# Altium PCB WIZ750SR.PcbDoc (part 1 of 2)
Units mm, origin at the board's own origin, x right, y up, seen from the top; angles counter-clockwise.
Board outline 45 x 30 mm, 4 copper layers (Top Layer, Internal Plane 1, Internal Plane 2, Bottom Layer); 93 components, 69 nets, 325 pads, 127 vias.
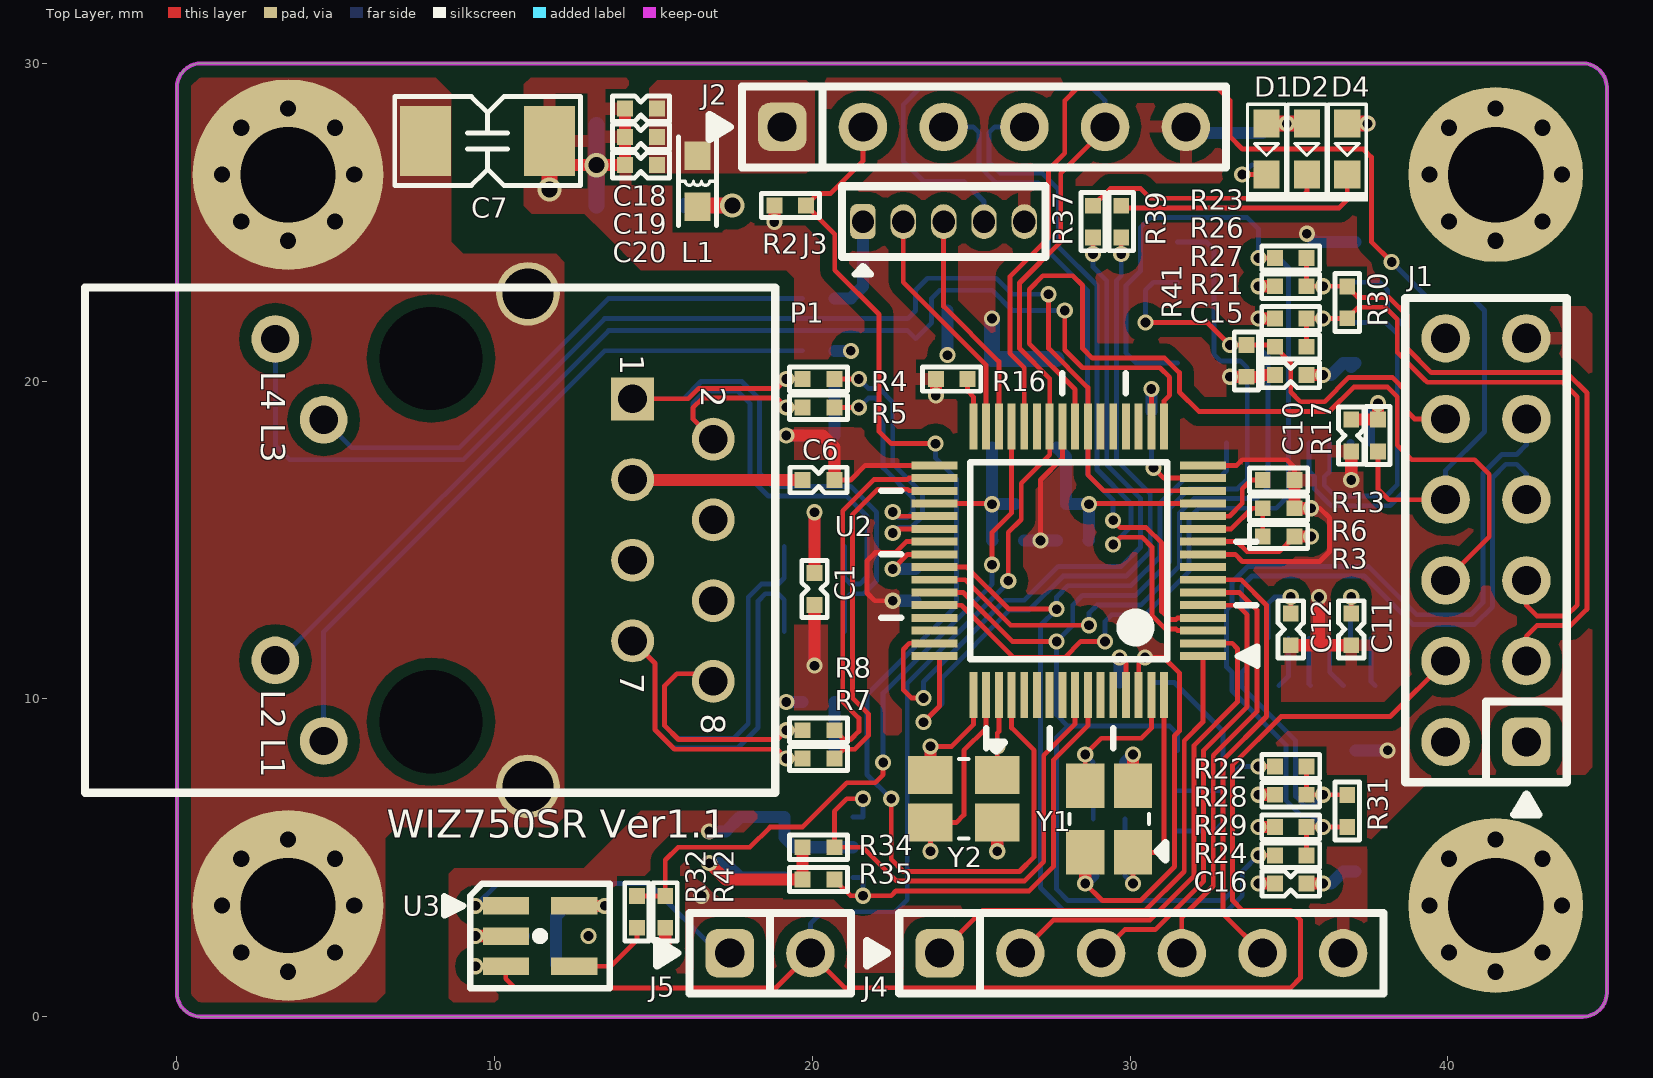
[diagram p0: Top Layer view]
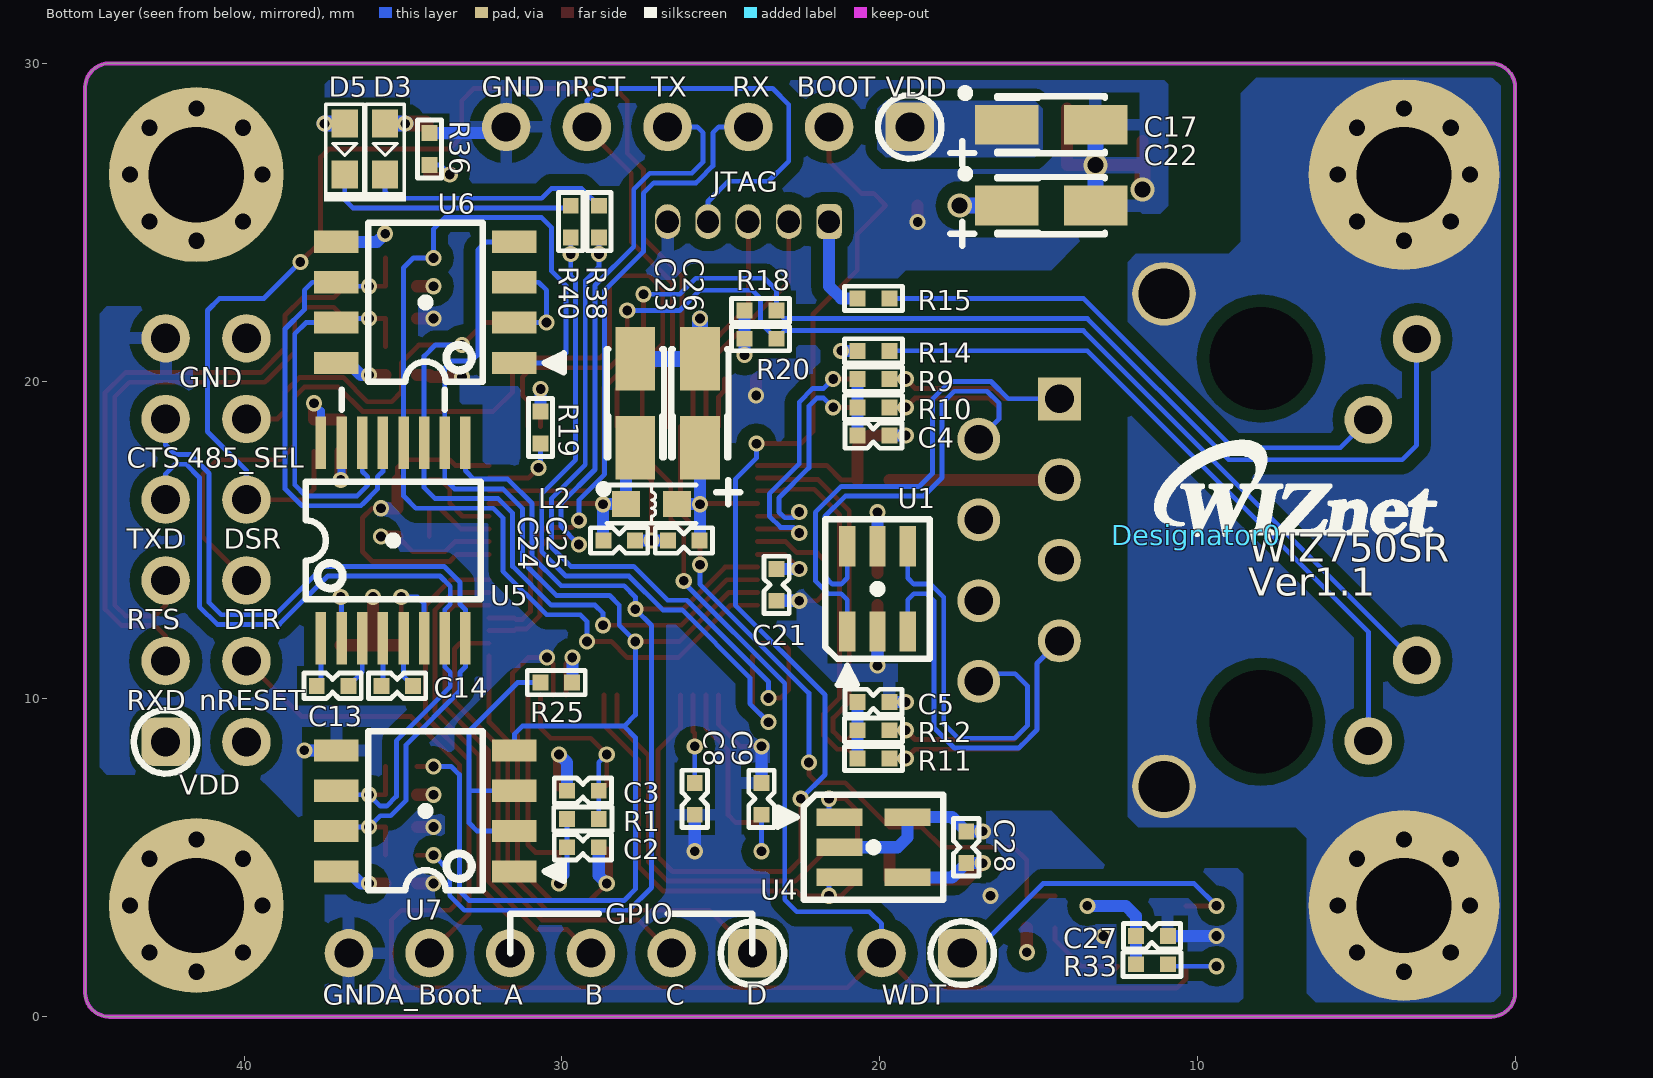
[diagram p1: Bottom Layer view, seen from below]
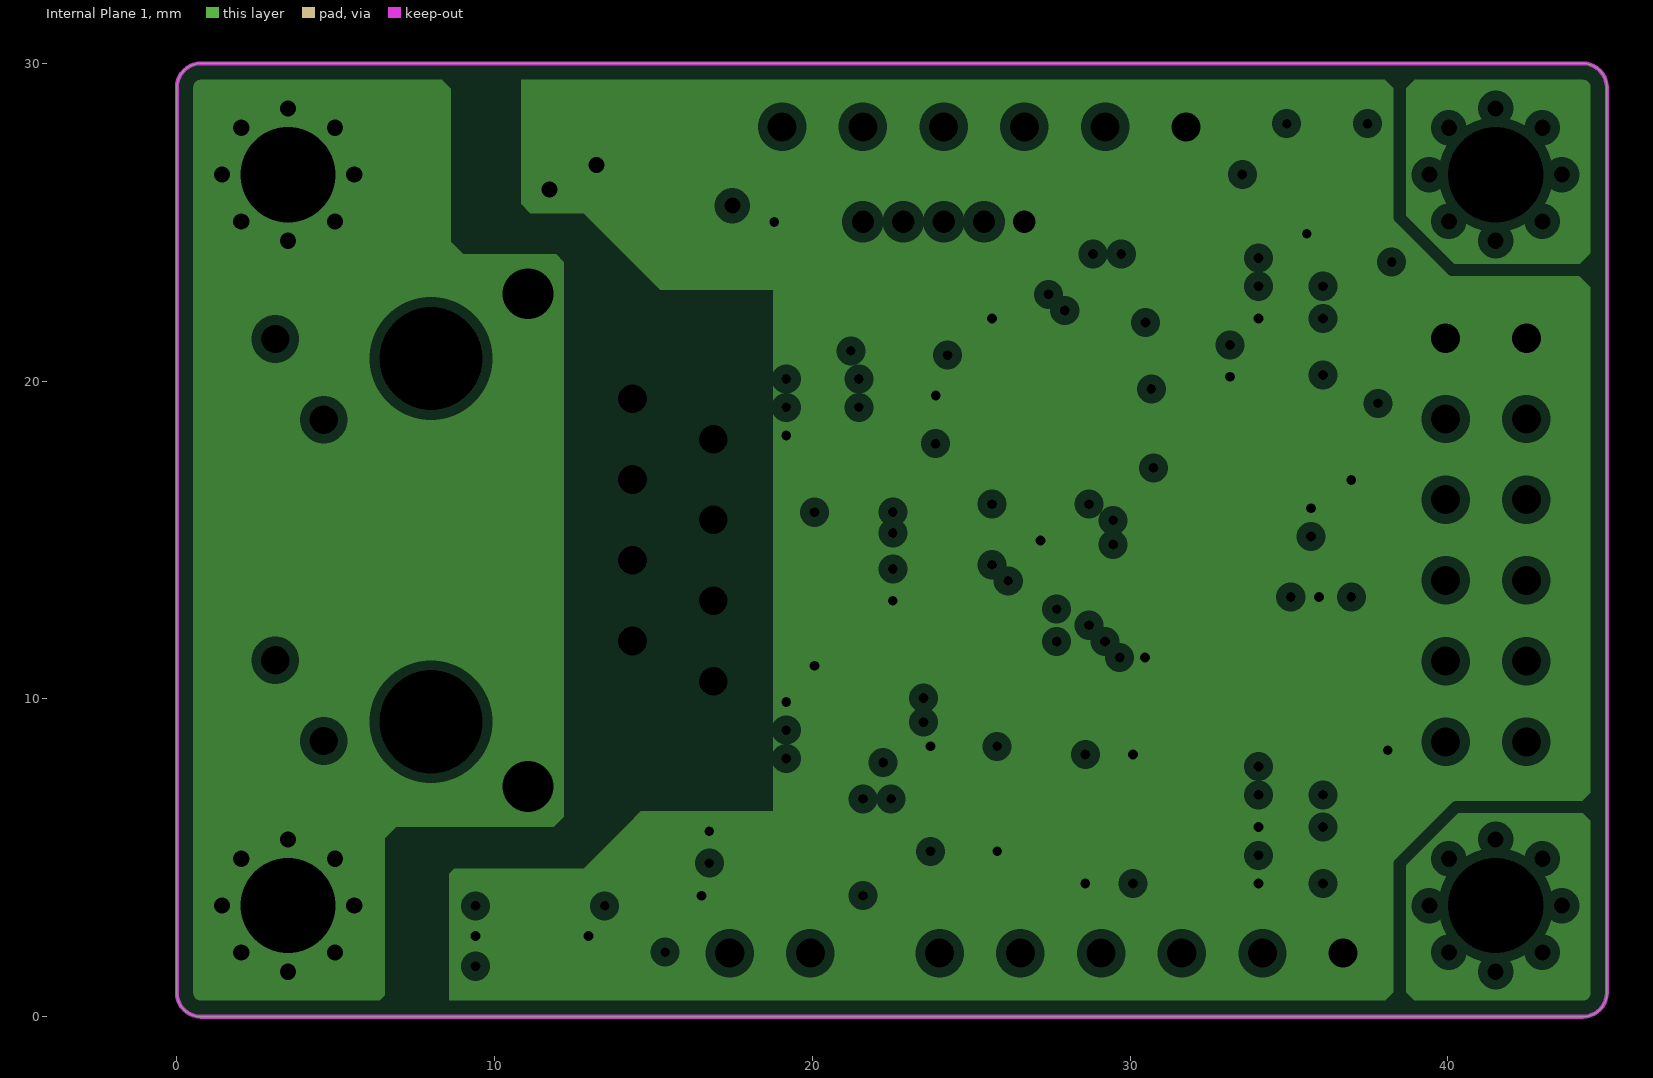
[diagram p2: Internal Plane 1, clearances drawn from the general rule]
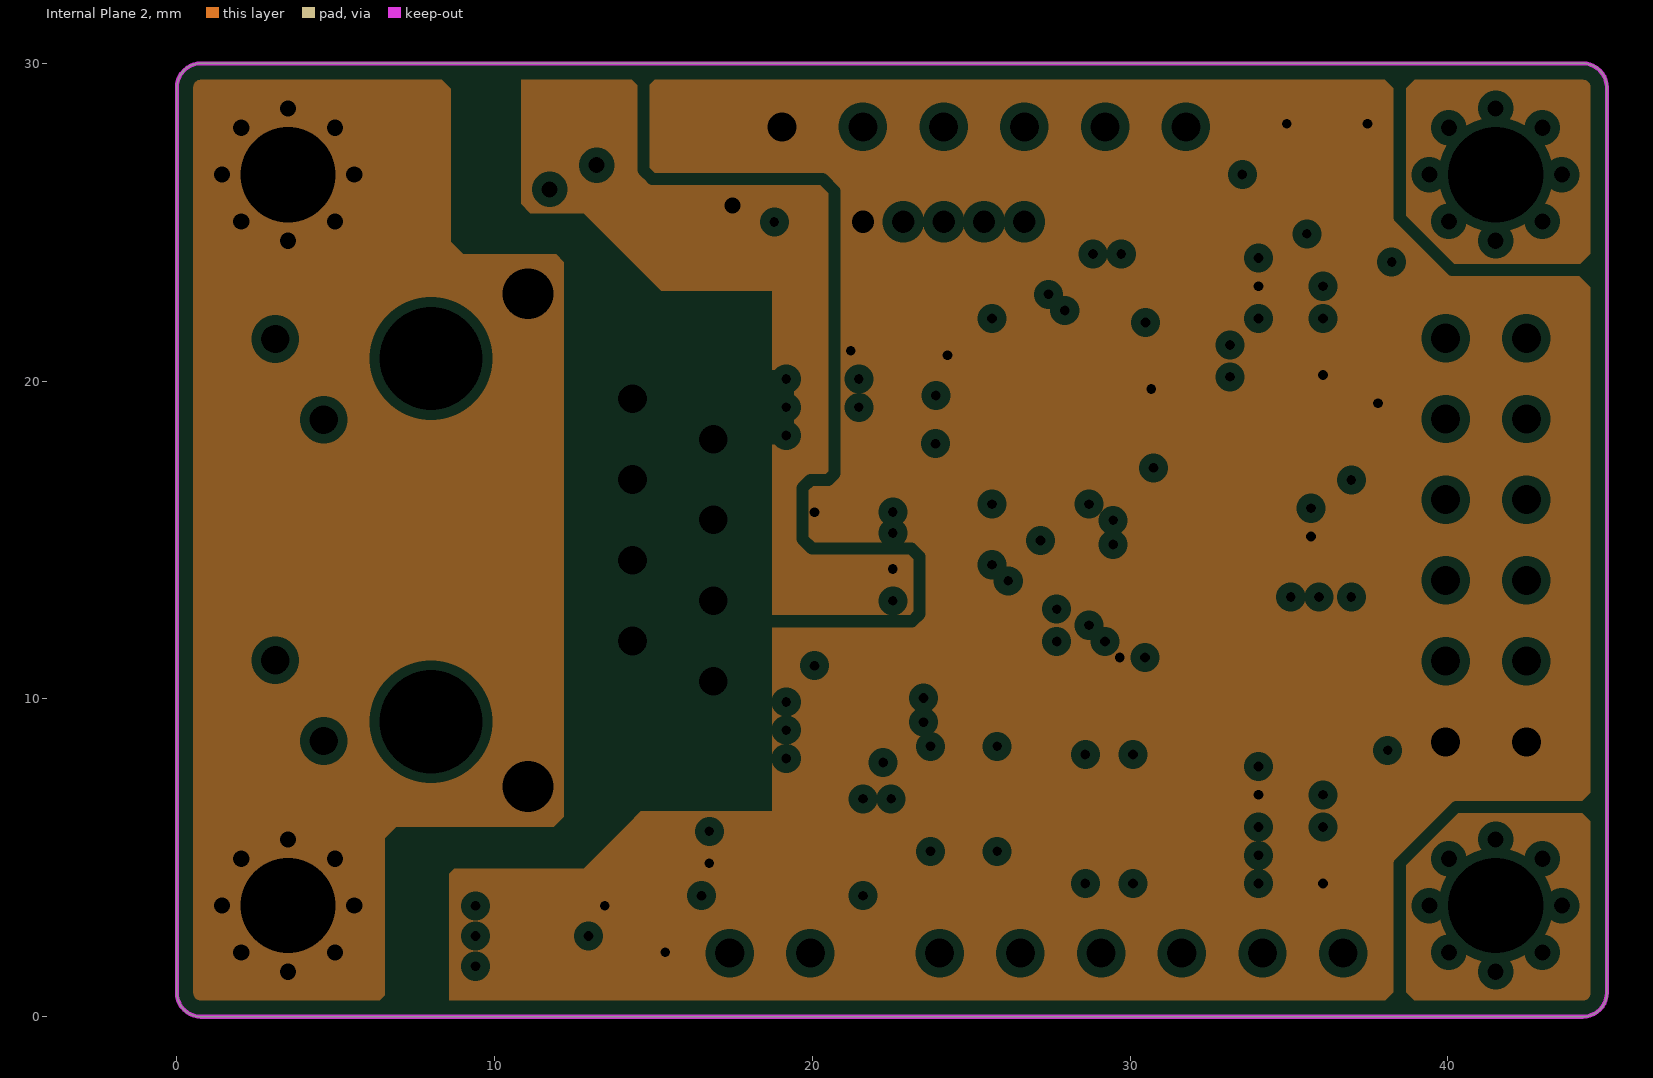
[diagram p3: Internal Plane 2, clearances drawn from the general rule]
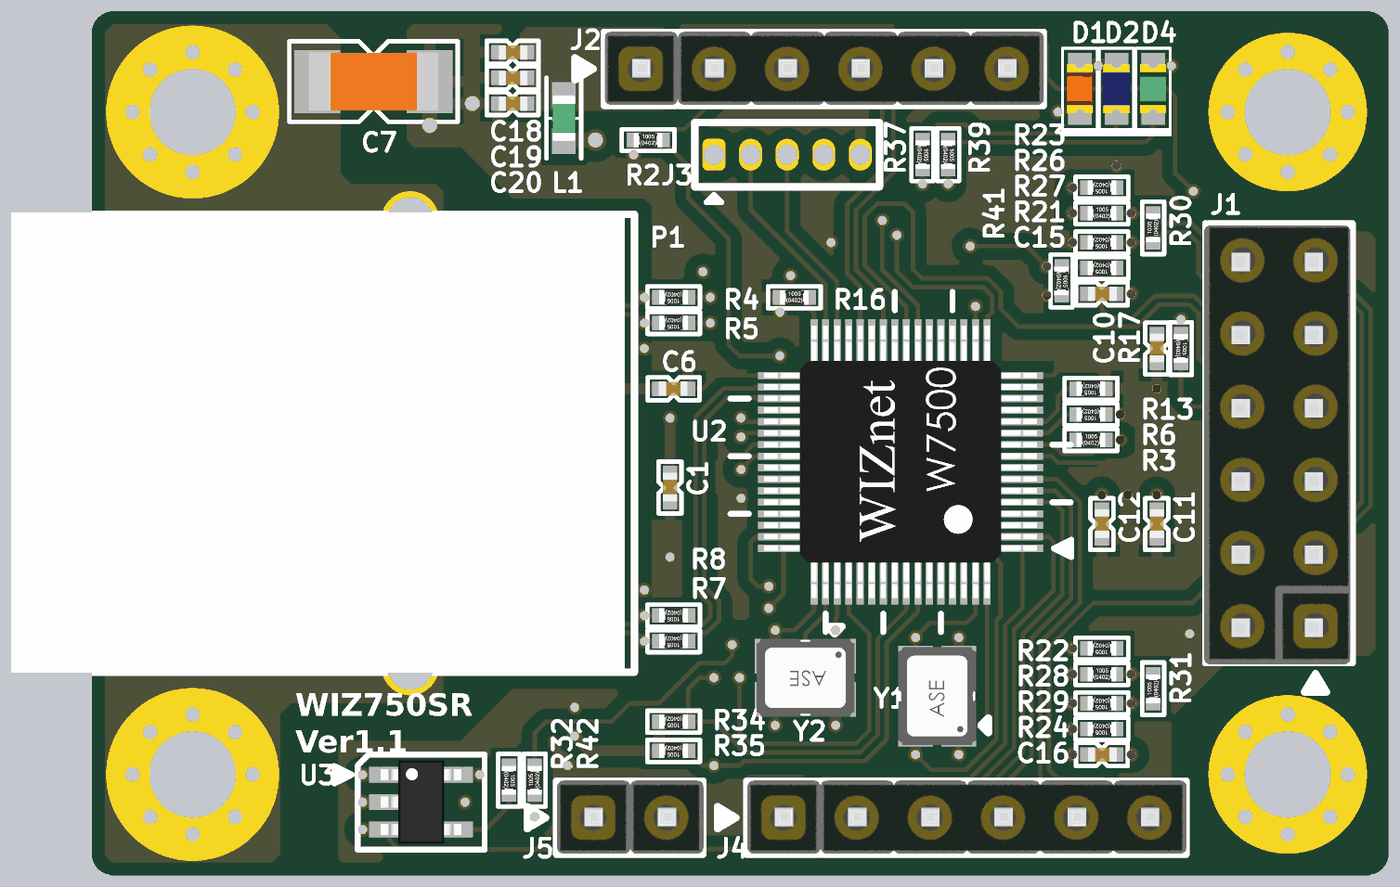
[diagram p5: 3D render of the assembled board from above, using the file's embedded part models]
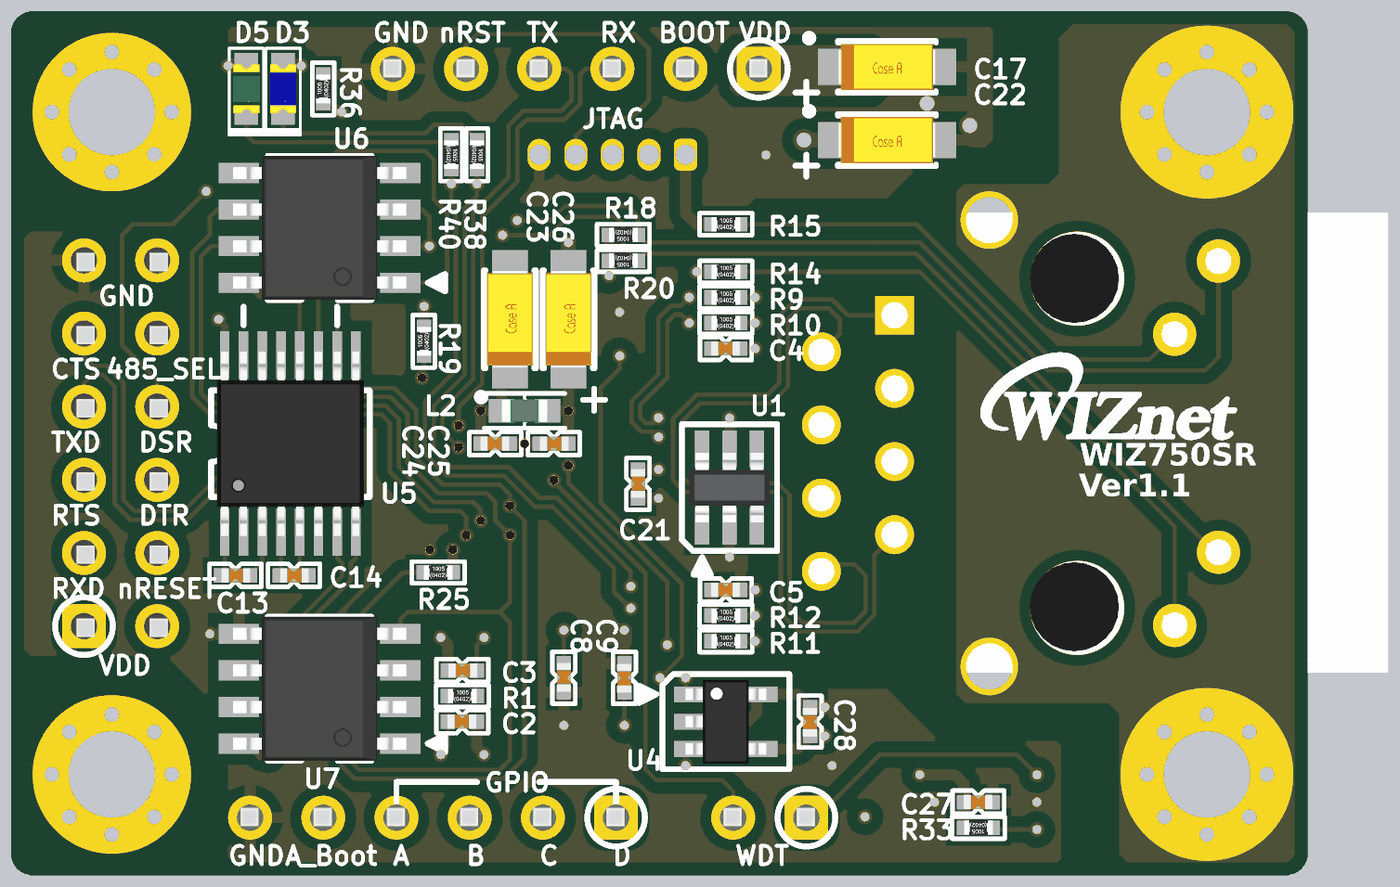
[diagram p6: 3D render of the assembled board from below, using the file's embedded part models]

## Layer stack, top to bottom
Top Solder: solder mask 0.0102, Solder Resist, Dk 3.5
Top Layer: signal copper 0.0356
Dielectric1: core 0.32, FR-4, Dk 4.8
Internal Plane 1: plane copper 0.0356, net (Multiple Nets)
Dielectric5: prepreg 0.32, FR-4, Dk 4.8
Internal Plane 2: plane copper 0.0356, net (Multiple Nets)
Dielectric6: core 0.32, FR-4, Dk 4.8
Bottom Layer: signal copper 0.0356
Bottom Solder: solder mask 0.0102, Solder Resist, Dk 3.5

## Board outline
0,0.762 0,29.238 cw(c0.762,29.238) 0.762,30 44.238,30 cw(c44.238,29.238) 45,29.238 45,0.762 cw(c44.238,0.762) 44.238,0 0.762,0 cw(c0.762,0.762)

## Design rules (kind name [scope] priority, off if disabled: settings)
Clearance [All] p1: gap=0.15 except(0.381: Arc-Poly Track-Poly SMDPad-Poly THPad-Poly Via-Poly Fill-Poly Poly-Poly Poly-Region)
DiffPairsRouting [All] p1: maxlimit=0.254 minlimit=0.127 mostfreqgap=0.152 toplayer_minwidth=0.152 toplayer_maxwidth=0.381 toplayer_prefwidth=0.152 bottomlayer_minwidth=0.152 bottomlayer_maxwidth=0.381 bottomlayer_prefwidth=0.152 maxuncoupledlength=15.24
HoleSize [All] p1: absolutevalues=TRUE maxlimit=4.064 minlimit=0.025 maxpercent=80.000 minpercent=20.000
PlaneClearance [All] p1: clearance=0.305
PlaneConnect [All] p1: planeconnectstyle=Direct reliefexpansion=0.508 reliefentries=4 reliefconductorwidth=0.254 reliefairgap=0.254
PolygonConnect PolygonConnect_2 [IsPad vs IsNamedPolygon('Top Layer-GND') Or  IsNamedPolygon('Bottom Layer-GND')] p1: connectstyle=Relief reliefconductorwidth=0.381 reliefentries=4 polygonreliefangle="90 Angle" airgapwidth=0.381
PolygonConnect PolygonConnect_1 [IsVia] p2: connectstyle=Direct reliefconductorwidth=0.254 reliefentries=4 polygonreliefangle="90 Angle" airgapwidth=0.254
PolygonConnect [All] p3: connectstyle=Direct reliefconductorwidth=0.254 reliefentries=4 polygonreliefangle="90 Angle" airgapwidth=0.254
RoutingVias [All] p1: holewidth=0.305 width=0.508 viastyle="Through Hole" minholewidth=0.305 minwidth=0.508 maxholewidth=0.508 maxwidth=0.762
SolderMaskExpansion [All] p1: expansion=0
Width [All] p1: maxlimit=2.54 minlimit=0.102 preferedwidth=0.152 minimp=50.000000 maximp=50.000000 favimp=50.000000
26 further rules are at their usual default settings.

## Classes and differential pairs
component class 1.WIZ750SR_W7500P: C1 C2 C3 C4 C5 C6 C7 C8 C9 P1 R1 R2 R3 R4 R5 R6 R7 R8 R9 R10 R11 R12 R13 R14 R15 R16 R17 R18 R19 R20 U1 U2 Y1 Y2
component class 2.WIZ750SR_Transceiver: C10 C11 C12 C13 C14 C15 C16 J1 LD1 LD2 R21 R22 R23 R24 R25 R26 R27 R28 R29 R30 R31 R41 U5 U6 U7
differential pair MDI_T: +MDI_T_P -MDI_T_N
differential pair MDI_R: +MDI_R_P -MDI_R_N
differential pair MDI0_T: +MDI0_T_P -MDI0_T_N
differential pair MDI0_R: +MDI0_R_P -MDI0_R_N

## Components (designator, comment, footprint, x,y, rotation, side; value= is the part's Value field where it differs from the comment)
C1 "0.1uF" CAP-0402 20.066,13.462 r90 top
C2 "30pF" CAP-0402 29.337,5.334 r0 bottom
C3 "30pF" CAP-0402 29.337,7.112 r180 bottom
C4 "0.1uF" CAP-0402 20.193,18.288 r0 bottom
C5 "0.1uF" CAP-0402 20.193,9.906 r0 bottom
C6 "0.1uF" CAP-0402 20.193,16.891 r180 top
C7 "1nF/2kV" CAP-1808 9.779,27.559 r180 top
C8 "27pF" CAP-0402 25.815,6.858 r90 bottom
C9 "27pF" CAP-0402 23.715,6.858 r270 bottom
C10 "0.1uF" CAP-0402 36.957,18.288 r90 top
C11 "0.1uF" CAP-0402 36.957,12.192 r90 top
C12 "0.1uF" CAP-0402 35.052,12.192 r90 top
C13 "0.1uF" CAP-0402 37.211,10.414 r180 bottom
C14 "0.1uF" CAP-0402 35.179,10.414 r180 bottom
C15 "0.1uF" CAP-0402 35.052,20.193 r0 top
C16 "0.1uF" CAP-0402 35.052,4.191 r0 top
C17 "10uF/16V" "CAP-A Size" 14.605,28.067 r180 bottom
C18 "0.1uF" CAP-0402 14.605,28.575 r0 top
C19 "0.1uF" CAP-0402 14.605,27.686 r0 top
C20 "0.1uF" CAP-0402 14.605,26.797 r0 top
C21 "0.1uF" CAP-0402 23.241,13.589 r90 bottom
C22 "10uF/16V" "CAP-A Size" 14.605,25.527 r180 bottom
C23 "10uF/16V" "CAP-A Size" 27.686,19.304 r90 bottom
C24 "0.1uF" CAP-0402 28.194,14.986 r0 bottom
C25 "0.1uF" CAP-0402 26.162,14.986 r180 bottom
C26 "10uF/16V" "CAP-A Size" 25.654,19.304 r90 bottom
C27 "0.1uF" CAP-0402 11.43,2.54 r0 bottom
C28 "0.1uF" CAP-0402 17.272,5.334 r270 bottom
D1 "RED-0603" LED-0603-RED 34.29,27.305 r270 top
D2 "BLUE-0603" LED-0603-BLUE 35.56,27.305 r270 top
D3 "BLUE-0603" LED-0603-BLUE 35.56,27.305 r270 bottom
D4 "GREEN-0603" LED-0603-GREEN 36.83,27.305 r270 top
D5 "GREEN-0603" LED-0603-GREEN 36.83,27.305 r270 bottom
Designator0 "Comment" LOGO-WIZNET(SMALL) 10.033,15.164 r180 bottom
J1 "2.54mm 6x2 Pin Header DIP" IDC-2X6 42.466,8.65 r90 top locked
J2 "2.54mm 1x6 Pin Header DIP" IDC-1X6 19.05,28 r0 top locked
J3 "1.27mm_1x5_Pin_header_DIP" IDC-1X5(1.27MM) 21.59,25.019 r0 top
J4 "2.54mm 1x6 Pin Header DIP" IDC-1X6 24.003,2 r0 top
J5 "2.54mm Pin Header" IDC-1X2 17.399,2 r0 top locked
L1 "HH-1M1608-121JT" IND-0603 16.383,26.289 r270 top
L2 "HH-1M1608-121JT" IND-0603 27.178,16.129 r180 bottom
P1 "BS-RB10005" RJ45-125BAG1A 8,15 r270 top locked
R1 "1M" RES-0402#1 29.337,6.223 r180 bottom
R2 "4.7K" RES-0402#1 19.304,25.527 r0 top
R3 "4.7K" RES-0402#1 34.671,15.113 r0 top
R4 "2.2R" RES-0402#1 20.193,20.066 r180 top
R5 "2.2R" RES-0402#1 20.193,19.177 r180 top
R6 "4.7K" RES-0402#1 34.671,16.002 r180 top
R7 "2.2R" RES-0402#1 20.193,8.128 r180 top
R8 "2.2R" RES-0402#1 20.193,9.017 r180 top
R9 "49.9R/1%" RES-0402#1 20.193,20.066 r180 bottom
R10 "49.9R/1%" RES-0402#1 20.193,19.177 r180 bottom
R11 "49.9R/1%" RES-0402#1 20.193,8.128 r180 bottom
R12 "49.9R/1%" RES-0402#1 20.193,9.017 r180 bottom
R13 "4.7K" RES-0402#1 34.671,16.891 r180 top
R14 "330R" RES-0402#1 20.193,20.955 r180 bottom
R15 "330R" RES-0402#1 20.193,22.606 r180 bottom
R16 "6.19K/1%" RES-0402#1 24.384,20.066 r0 top
R17 "4.7K" RES-0402#1 37.795,18.288 r270 top
R18 "5.1K" RES-0402#1 23.749,22.225 r0 bottom
R19 "5.1K" RES-0402#1 30.67,18.542 r90 bottom
R20 "5.1K" RES-0402#1 23.749,21.336 r0 bottom
R21 "0R" RES-0402#1 35.052,21.082 r180 top
R22 "0R" RES-0402#1 35.052,7.874 r180 top
R23 "0R" RES-0402#1 35.052,23.876 r180 top
R24 "0R" RES-0402#1 35.052,5.08 r180 top
R25 "4.7K" RES-0402#1 30.175,10.516 r180 bottom
R26 "200R" RES-0402#1 35.052,22.987 r0 top
R27 "200R" RES-0402#1 35.052,21.971 r180 top
R28 "200R" RES-0402#1 35.052,6.985 r0 top
R29 "200R" RES-0402#1 35.052,5.969 r180 top
R30 "120R" RES-0402#1 36.83,22.479 r90 top
R31 "120R" RES-0402#1 36.83,6.477 r90 top
R32 "0R" RES-0402#1 14.478,3.302 r270 top
R33 "4.7K" RES-0402#1 11.43,1.651 r0 bottom
R34 "4.7K" RES-0402#1 20.193,5.334 r180 top
R35 "4.7K" RES-0402#1 20.193,4.318 r180 top
R36 "330R" RES-0402#1 34.163,27.305 r90 bottom
R37 "1K" RES-0402#1 28.829,25.019 r270 top
R38 "1K" RES-0402#1 28.829,25.019 r270 bottom
R39 "330R" RES-0402#1 29.718,25.019 r270 top
R40 "330R" RES-0402#1 29.718,25.019 r270 bottom
R41 "NC" RES-0402#1 33.655,20.637 r270 top
R42 "4.7K" RES-0402#2 15.367,3.302 r90 top
U1 "tpd4s009" SOT-23-6L 20.066,13.462 r90 bottom
U2 "W7500P" W7500-LQFP64 28.067,14.351 r180 top locked
U3 "STM6823RWY6F" SOT-23-5L 11.43,2.54 r0 top
U4 "24AA16T-I/OT" SOT-23-5L 20.193,5.334 r180 bottom
U5 "SP3232EBEY" TSSOP16(0.65/6.4) 35.306,14.986 r90 bottom locked
U6 "SP3485EN" SO-08 34.29,22.479 r0 bottom
U7 "SP3485EN" SO-08 34.29,6.477 r0 bottom
Y1 "12MHz" OSC-TZ1067B 29.337,6.223 r90 top
Y2 "25MHz" OSC-82J0626 24.765,6.858 r180 top

## Footprints (in the part's own frame and the unit in brackets; to place one, negate y for a bottom-side part, rotate by r counter-clockwise, add the part's x,y. Pads: shape width x height; smd on the part's side, far side on the other; paste and mask are expansions set on the pad)
CAP-0402 [mm]
  rect 0.5x0.5 smd: 1(-0.5,0) 2(0.5,0)
  silkscreen extent -0.9,-0.4 0.9,0.4, body extent -0.48,-0.25 0.52,0.25, height 0.6
CAP-1808 [mm] "Ceramic CAP 1808(4520)"
  rect 1.6x2.2 smd: 1(-1.95,0) 2(1.95,0)
  silkscreen extent -2.92,-1.4 2.92,1.4, body extent -2.25,-1.02 2.25,1.01, height 2
"CAP-A Size" [mm] "Tantal CAP A Size EIA/IECQ 3216"
  rect 2x1.25 smd: 1(-1.4,0) 2(1.4,0)
  silkscreen extent -3.17,-1.27 1.7,1.12, body extent -1.7,-0.8 1.7,0.8, height 1.75
IDC-1X2 [mil]
  rrect50% 60x60 hole 36: 1(0,0)
  round 60 hole 36: 2(100,0)
  silkscreen extent -90,-50 150,50, body extent -49,-49 151,51, height 336
IDC-1X5(1.27MM) [mm]
  rrect50% 0.8x1.1 hole 0.7: 1(0,0)
  oval 0.8x1.1 hole 0.7: 2(1.27,0) 3(2.54,0) 4(3.81,0) 5(5.08,0)
  silkscreen extent -0.66,-1.65 5.74,1.11
IDC-1X6 [mil] "6-Way 2.54 mm Male Header"
  rrect50% 60x60 hole 36: 1(0,0)
  round 60 hole 36: 2(100,0) 3(200,0) 4(300,0) 5(400,0) 6(500,0)
  silkscreen extent -90,-50 550,50, body extent -49,-49 551,51, height 336
IDC-2X6 [mil]
  rrect50% 60x60 hole 36: 1(0,0)
  round 60 hole 36: 2(0,100) 3(100,0) 4(100,100) 5(200,0) 6(200,100) 7(300,0) 8(300,100) 9(400,0) 10(400,100) 11(500,0) 12(500,100)
  silkscreen extent -90,-50 550,150, body extent -52,-48 548,152, height 336
IND-0603 [mm] "Inductor 0603(1608)"
  rect 0.89x0.82 smd: 1(-0.8,0) 2(0.8,0)
  silkscreen extent -1.4,-0.6 1.4,0.6, body extent -0.8,-0.4 0.8,0.4, height 0.95
LED-0603-BLUE [mm] "LED-0603-BLUE"
  rect 0.89x0.82 smd: 1(-0.8,0) 2(0.8,0)
  silkscreen extent -1.41,-0.65 1.65,0.65, body extent -0.85,-0.45 0.85,0.45, height 0.9
LED-0603-GREEN [mm] "LED-0603-GREEN"
  rect 0.89x0.82 smd: 1(-0.8,0) 2(0.8,0)
  silkscreen extent -1.41,-0.65 1.65,0.65, body extent -0.85,-0.45 0.85,0.45, height 0.9
LED-0603-RED [mm] "LED-0603-RED"
  rect 0.89x0.82 smd: 1(-0.8,0) 2(0.8,0)
  silkscreen extent -1.41,-0.65 1.65,0.65, body extent -0.85,-0.45 0.85,0.45, height 0.9
LOGO-WIZNET(SMALL) [mm]
  silkscreen extent -1.27,0 7.52,2.93
OSC-82J0626 [mm]
  rect 1.4x1.2 smd: 1(-1.05,-0.75) 2(1.05,-0.75) 3(1.05,0.75) 4(-1.05,0.75)
  silkscreen extent -1.27,-1.78 0.15,1.25, body extent -1.7,-1.35 1.7,1.35, height 1.06
OSC-TZ1067B [mm]
  rect 1.4x1.2 smd: 1(-1.05,-0.75) 2(1.05,-0.75) 3(1.05,0.75) 4(-1.05,0.75)
  silkscreen extent -1.27,-1.78 0.15,1.25, body extent -1.7,-1.35 1.7,1.35, height 1.06
RES-0402#1 [mm]
  rect 0.5x0.5 smd: 1(-0.5,0) 2(0.5,0)
  silkscreen extent -0.91,-0.38 0.91,0.38, body extent -0.5,-0.25 0.5,0.25, height 0.35
RES-0402#2 [mm]
  rect 0.5x0.5 smd: 1(-0.5,-0.004) 2(0.5,-0.004)
  silkscreen extent -0.91,-0.38 0.91,0.38, body extent -0.5,-0.25 0.5,0.25, height 0.35
RJ45-125BAG1A [mm]
  round 1.5 hole 0.89: L1(6.325,-3.38) L2(3.785,-4.9) L3(-3.785,-3.38) L4(-6.325,-4.9)
  rect 1.35x1.35 hole 0.9: R1(-4.445,6.34)
  round 1.35 hole 0.9: R2(-3.175,8.88) R3(-1.905,6.34) R4(-0.635,8.88) R5(0.635,6.34) R6(1.905,8.88) R7(3.175,6.34) R8(4.445,8.88)
  round 2 hole 1.6: R9(-7.75,3.05) R10(7.75,3.05)
  round 1.8 hole 3.25: ""(-5.715,0) ""(5.715,0)
  silkscreen extent -7.95,-10.89 7.95,10.83, body extent -8.03,-10.8 7.97,10.5, height 13.1
SO-08 [mm]
  rect 1.4x0.7 smd: 1(-2.8,1.905) 2(-2.8,0.635) 3(-2.8,-0.635) 4(-2.8,-1.905) 5(2.8,-1.905) 6(2.8,-0.635) 7(2.8,0.635) 8(2.8,1.905)
  silkscreen extent -4.35,-2.5 1.8,2.5, body extent -3.01,-2.5 3.01,2.5, height 1.75
SOT-23-5L [mm]
  rect 1.45x0.55 smd: 1(-1.075,0.95) 2(-1.075,0) 3(-1.075,-0.95) 4(1.075,-0.95) 5(1.075,0.95)
  silkscreen extent -3.01,-1.65 2.2,1.65, body extent -1.4,-1.45 1.4,1.45, height 1.45
SOT-23-6L [mm]
  rect 1.27x0.508 smd: 1(-1.34,0.95) 2(-1.34,0) 3(-1.34,-0.95) 4(1.34,-0.95) 5(1.34,0) 6(1.34,0.95)
  silkscreen extent -3.02,-1.65 2.2,1.65, body extent -1.21,-1.4 1.21,1.4, height 1.09
TSSOP16(0.65/6.4) [mil]
  rect 65x13 smd: 1(-121.04,89.57) 2(-121.04,63.98) 3(-121.04,38.39) 4(-121.04,12.8) 5(-121.04,-12.8) 6(-121.04,-38.39) 7(-121.04,-63.98) 8(-121.04,-89.57) 9(121.04,-89.57) 10(121.04,-63.98) 11(121.04,-38.39) 12(121.04,-12.8) 13(121.04,12.8) 14(121.04,38.39) 15(121.04,63.98) 16(121.04,89.57)
  silkscreen extent -73,-108 187,108, body extent -126,-100 126,100, height 47
W7500-LQFP64 [mm] "WIZnet ARM Cortex-M0, LQFP64, Pitch 0.40mm"
  rect 1.45x0.25 smd: 1(-4.225,3) 2(-4.225,2.6) 3(-4.225,2.2) 4(-4.225,1.8) 5(-4.225,1.4) 6(-4.225,1) 7(-4.225,0.6) 8(-4.225,0.2) 9(-4.225,-0.2) 10(-4.225,-0.6) 11(-4.225,-1) 12(-4.225,-1.4) 13(-4.225,-1.8) 14(-4.225,-2.2) 15(-4.225,-2.6) 16(-4.225,-3) 33(4.225,-3) 34(4.225,-2.6) 35(4.225,-2.2) 36(4.225,-1.8) 37(4.225,-1.4) 38(4.225,-1) 39(4.225,-0.6) 40(4.225,-0.2) 41(4.225,0.2) 42(4.225,0.6) 43(4.225,1) 44(4.225,1.4) 45(4.225,1.8) 46(4.225,2.2) 47(4.225,2.6) 48(4.225,3)
  rect 0.25x1.45 smd: 17(-3,-4.225) 18(-2.6,-4.225) 19(-2.2,-4.225) 20(-1.8,-4.225) 21(-1.4,-4.225) 22(-1,-4.225) 23(-0.6,-4.225) 24(-0.2,-4.225) 25(0.2,-4.225) 26(0.6,-4.225) 27(1,-4.225) 28(1.4,-4.225) 29(1.8,-4.225) 30(2.2,-4.225) 31(2.6,-4.225) 32(3,-4.225) 49(3,4.225) 50(2.6,4.225) 51(2.2,4.225) 52(1.8,4.225) 53(1.4,4.225) 54(1,4.225) 55(0.6,4.225) 56(0.2,4.225) 57(-0.2,4.225) 58(-0.6,4.225) 59(-1,4.225) 60(-1.4,4.225) 61(-1.8,4.225) 62(-2.2,4.225) 63(-2.6,4.225) 64(-3,4.225)
  silkscreen extent -5.92,-5.9 5.9,5.9, body extent -4.73,-4.74 4.73,4.72, height 1

## Part data
C1 C2 C3 C4 C5 C6 C8 C9 C10 C11 C12 C13 C14 C15 C16 C18 C19 C20 C21 C24 C25 C27 C28: library part CAP-0402, "Ceramic CAP 0402(1005)"
C7: library part CAP-1808, "Ceramic CAP 1808(4520)"
C17 C22 C23 C26: library part "CAP-A Size", "Tantla CAP A Size EIA/IECQ 3216"
D1 D2 D3 D4 D5: library part LED-0603, "LED-0603"
J1: library part "Header 6X2", "Header, 6-Pin, Dual row"
J2 J4: library part "Header 6", "Header, 6-Pin"
J5: library part "Header 2", "Header, 2-Pin"
L1 L2: library part IND-0603, "Inductor 0603(1608)"
P1: library part RB1-125BAG1A, "10/100 BASE-TX MAGJACK"
R1 R2 R3 R4 R5 R6 R7 R8 R9 R10 R11 R12 R13 R14 R15 R16 R17 R18 R19 R20 R21 R22 R23 R24 R25 R26 R27 R28 R29 R30 R31 R32 R33 R34 R35 R36 R37 R38 R39 R40 R41 R42: library part RES-0402, "RES-0402"
U1: "6-PIN SOT DBVor DCK Package"
U2: "WIZnet ARM Cortex-M0, Add PHY"
U3: library part STM6823, "Manual_Reset SOT23-5"
U4: library part 24AAxxT-i-OT, "SOT-23"
U5: "True +3.0V to +5.5V RS-232 Transceivers TSSOP16"
U6 U7: "RS485 Transceiver"
Y1: library part OSC-TZ1067B-12MHz, "X-tal 12MHz,3.2x2.5 SMD, CL=20pF"
Y2: library part OSC-82J0626-25MHz, "X-tal 25MHz,3.2x2.5 SMD, CL=18pF"

## Free pads (board coordinates)
  round 6 hole 3: ""(3.5,3.5) ""(3.5,26.5)
  round 5.5 hole 3: ""(41.5,3.5) ""(41.5,26.5)

## Via types
v1: diameter 0.508, hole 0.305, Top Layer to Bottom Layer, tented both sides, 92 vias
v2: diameter 0.762, hole 0.508, Top Layer to Bottom Layer, tented both sides, 35 vias

## Nets (pads, with @x,y where several pads share a name; then routed paths per layer and width w, separated by ;. In a path a pad name is that pad's centre, name@x,y a point inside that pad or via, vN(x,y) a via of type N, cw(c..) or ccw(c..) an arc to the next point about the centre after c; other vN are vias at no path point)
100M_LED: P1.L2 R20.1 U2.17 | length 37.1
  Top Layer w0.152: v1(27.94,22.225) 27.94,20.98 28.499,20.422 30.937,20.422 31.242,20.117 31.242,19.558 31.067,19.383 U2.17@31.067,18.576
  Bottom Layer w0.152: P1.L2@3.1,11.215 3.214,11.215 13.589,21.59 22.995,21.59 R20.1@23.249,21.336 23.749,21.836 23.749,22.606 24.003,22.86 25.654,22.86 26.289,22.225 v1(27.94,22.225)
422_TXD+: J1.7 R22.1 R28.2 R31.2 U5.7 U7.6 | length 26.8
  Top Layer w0.152: R22.1@35.552,7.874 R28.2@35.552,6.985 v1(36.068,6.985) R31.2@36.822,6.985
  Bottom Layer w0.152: U7.6@36.963,6.985 v1(36.068,6.985) 35.712,6.629 35.509,6.629 35.204,6.934 35.204,8.687 33.508,10.383 33.508,10.837 33.681,11.01 U5.7@33.681,11.912 33.681,12.813 33.508,12.986 33.508,13.544 33.833,13.868 37.364,13.868 38.888,12.344 40.843,12.344 41.402,12.903 41.402,16.968 41.822,17.388 42.164,17.388 42.466,17.086 J1.7@42.466,16.27
422_TXD-: J1.9 R24.1 R29.1 R31.1 U5.8 U7.7 | length 27.8
  Top Layer w0.152: R24.1@35.552,5.08 R29.1@35.552,5.969 v1(36.068,5.969) R31.1@36.822,5.969
  Bottom Layer w0.152: U7.7@36.963,5.969 v1(36.068,5.969) 35.712,6.325 35.383,6.325 34.9,6.808 34.9,8.561 33.204,10.257 33.204,10.837 33.031,11.01 U5.8@33.031,11.912 33.031,12.813 33.204,12.986 33.204,13.67 33.707,14.173 37.49,14.173 39.014,12.649 40.717,12.649 41.097,13.029 41.097,17.094 41.695,17.692 42.164,17.692 42.466,17.994 J1.9@42.466,18.81
485+: J1.3 R23.1 R26.2 R30.2 U5.13 U6.6 | length 34.9
  Top Layer w0.152: R23.1@35.552,23.876 R26.2@35.552,22.987 v1(36.068,22.987) R30.2@36.822,22.987 ; R30.2@36.83,22.979 37.178,22.631 38.15,22.631 38.71,22.072 38.71,21.031 39.472,20.269 43.738,20.269 44.374,19.633 44.374,12.828 44.285,12.738 43.854,12.308 42.799,12.308 42.466,11.975 J1.3@42.466,11.19
  Bottom Layer w0.152: U5.13@35.631,18.06 35.631,17.159 35.804,16.986 35.804,16.597 36.233,16.167 36.323,16.078 38.176,16.078 38.71,16.612 38.71,21.641 38.1,22.25 38.1,22.86 37.846,23.114 U6.6@37.09,23.114 ; v1(36.068,22.987) U6.6@36.963,22.987
485-: J1.5 R21.1 R27.1 R30.1 U5.14 U6.7 | length 31.7
  Top Layer w0.152: R21.1@35.552,21.082 R27.1@35.552,21.971 v1(36.068,21.971) 36.822,21.971 R30.1@36.83,21.979 37.178,22.327 38.024,22.327 38.405,21.946 38.405,20.905 39.256,20.054 39.345,19.964 43.612,19.964 44.069,19.507 44.069,12.954 43.727,12.612 42.799,12.612 42.466,12.945 J1.5@42.466,13.73
  Bottom Layer w0.152: v1(36.068,21.971) U6.7@36.963,21.971 ; U5.14@36.281,18.06 36.281,17.159 36.108,16.986 36.108,16.724 36.449,16.383 38.05,16.383 38.405,16.738 38.405,21.488 38.049,21.844 U6.7@37.09,21.844
485_SEL: J1.10 R21.2 R41.1 U2.42 U5.11 U6.2 U6.3 | length 34.9
  Top Layer w0.152: U2.42@23.842,13.751 24.806,13.751 26.238,12.319 v1(28.702,12.319) ; v1(30.48,21.844) 32.432,21.844 v1(33.139,21.137) R41.1@33.655,21.137 34.497,21.137 R21.2@34.552,21.082 35.052,20.582 35.052,19.66 35.357,19.355 36.119,19.355 36.881,20.117 38.252,20.117 38.71,19.66 38.71,19.05 38.95,18.81 J1.10@39.926,18.81
  Bottom Layer w0.152: v1(28.702,12.319) 28.702,12.7 28.956,12.954 30.328,12.954 31.547,14.173 31.547,15.85 32.004,16.307 33.985,16.307 34.331,16.653 U5.11@34.331,18.06 34.331,20.787 33.981,21.137 v1(33.139,21.137) ; U6.2@31.49,21.844 v1(30.48,21.844) 30.48,22.86 30.734,23.114 U6.3@31.49,23.114
APP_BOOT: J4.5 U2.7 | length 14.4
  Top Layer w0.152: U2.7@32.292,13.751 33.493,13.751 34.29,12.954 34.29,9.449 32.918,8.077 32.918,3.245 J4.5@34.163,2
BOOT: J2.2 R2.2 U2.52 | length 38.5
  Top Layer w0.152: J2.2@21.59,28 21.59,26.924 20.574,25.908 20.185,25.908 R2.2@19.804,25.527 20.701,24.63 20.701,23.495 22.098,22.098 22.098,18.415 22.479,18.034 v1(23.876,18.034) ; v1(22.479,6.858) 22.479,4.953 22.86,4.572 26.518,4.572 26.975,5.029 26.975,8.382 26.267,9.09 U2.52@26.267,10.126
  Bottom Layer w0.152: v1(22.479,6.858) 21.717,7.62 21.717,10.135 24.536,12.954 24.536,16.916 23.876,17.577 v1(23.876,18.034)
CH_GND: C7.2 P1.R9 P1.R10 pad.@3.5,3.5 pad.@3.5,26.5
  other v2: 3.5,1.417 2.027,2.027 4.973,2.027 1.417,3.5 5.583,3.5 2.027,4.973 4.973,4.973 3.5,5.583 3.5,24.417 2.027,25.027 4.973,25.027 1.417,26.5 5.583,26.5 2.027,27.973 4.973,27.973 3.5,28.583
DSR: J1.8 R17.2 U2.28 | length 39.6
  Top Layer w0.152: U2.28@26.667,18.576 26.667,20.425 26.213,20.879 26.213,23.292 27.432,24.511 27.432,26.67 27.94,27.178 27.94,28.829 28.321,29.21 32.766,29.21 33.147,28.829 33.147,27.686 33.528,27.305 37.338,27.305 37.592,27.051 37.592,24.384 v1(38.227,23.749) ; R17.2@37.795,17.788 37.795,16.612 38.137,16.27 J1.8@39.926,16.27
  Bottom Layer w0.152: v1(38.227,23.749) 39.37,22.606 40.767,22.606 41.148,22.225 41.148,18.415 39.926,17.193 J1.8@39.926,16.27
DTR: J1.6 U2.24 | length 29.1
  Top Layer w0.152: U2.24@28.267,18.576 28.267,19.739 26.822,21.184 26.822,22.885 27.254,23.317 28.194,23.317 28.499,23.012 28.499,21.031 28.804,20.726 31.09,20.726 31.547,20.269 31.547,19.66 32.156,19.05 36.271,19.05 37.033,19.812 38.1,19.812 38.405,19.507 38.405,17.983 38.862,17.526 40.843,17.526 41.3,17.069 41.3,15.104 J1.6@39.926,13.73
EXPANSION_GPIO_A: J4.4 U2.6 | length 13.7
  Top Layer w0.152: J4.4@31.623,2 31.623,3.124 32.614,4.115 32.614,8.23 33.985,9.601 33.985,12.802 33.436,13.351 U2.6@32.292,13.351
EXPANSION_GPIO_B: J4.3 U2.5 | length 14.6
  Top Layer w0.152: J4.3@29.083,2 29.826,2.743 30.785,2.743 32.309,4.267 32.309,8.382 33.68,9.754 33.68,12.649 33.379,12.951 U2.5@32.292,12.951
EXPANSION_GPIO_C: J4.2 U2.2 | length 15.3
  Top Layer w0.152: J4.2@26.543,2 27.591,3.048 30.632,3.048 32.004,4.42 32.004,8.534 33.376,9.906 33.376,11.582 33.207,11.751 U2.2@32.292,11.751
EXPANSION_GPIO_D: J4.1 U2.1 | length 15.8
  Top Layer w0.152: J4.1@24.003,2 25.356,3.353 30.48,3.353 31.699,4.572 31.699,8.687 32.292,9.28 U2.1@32.292,11.351
GND: C1.1 C2.1 C3.1 C4.1 C5.1 C6.1 C7.1 C8.1 C9.1 C10.1 C11.1 C12.1 C15.1 C16.1 C17.2 C18.1 C19.1 C20.1 C21.1 C22.2 C23.2 C24.1 C25.1 C26.2 C27.1 C28.1 J1.11 J1.12 J2.6 J3.5 J4.6 R2.1 R6.1 R13.1 R16.1 R27.2 R29.2 R36.2 R41.2 U1.2 U2.9 U2.16 U2.25 U2.33 U2.39 U2.49 U2.62 U3.2 U4.2 U4.5 U5.15 U6.5 U7.5 Y1.2 Y1.4 Y2.2 Y2.4 | length 88.1
  Top Layer w0.152: C6.1@20.693,16.891 21.209,16.891 21.669,17.351 U2.33@23.842,17.351 ; v1(22.53,13.089) 21.963,13.089 21.717,13.335 21.717,14.351 21.971,14.605 22.606,14.605 22.952,14.951 U2.39@23.842,14.951 ; v1(23.715,8.509) 24.384,8.509 25.067,9.192 U2.49@25.067,10.126 ; v1(27.178,14.986) 27.178,16.891 27.867,17.58 U2.25@27.867,18.576 ; v1(28.587,4.191) 29.12,3.658 30.328,3.658 31.394,4.724 31.394,8.839 31.547,8.992 31.547,10.82 31.064,11.303 v1(30.467,11.303) 30.267,11.103 U2.62@30.267,10.126 ; U2.9@32.292,14.551 33.303,14.551 33.528,14.326 35.966,14.326 36.271,14.63 36.271,15.697 35.966,16.002 v1(35.687,16.002) ; U2.16@32.292,17.351 33.353,17.351 33.528,17.526 34.925,17.526 35.171,17.28 R13.1@35.171,16.891
  Top Layer w0.381: v1(9.398,2.54) U3.2@10.355,2.54 ; C7.1@11.729,27.559 11.729,26.797 v2(13.208,26.797) C20.1@14.105,26.797 C19.1@14.105,27.686 C18.1@14.105,28.575 ; v1(18.804,25.011) R2.1@18.804,25.527 ; v1(19.177,18.288) 20.32,18.288 20.693,17.915 C6.1@20.693,16.891 ; v1(20.066,11.049) C1.1@20.066,12.962 ; Y2.2@23.715,7.608 v1(23.715,8.509) ; v1(23.884,19.55) R16.1@23.884,20.066 ; v1(25.815,5.207) Y2.4@25.815,6.108 ; v1(28.587,4.191) Y1.4@28.587,5.173 ; Y1.2@30.087,7.273 v1(30.087,8.255) ; v1(33.139,20.138) R41.2@33.655,20.138 34.108,20.138 34.163,20.193 C15.1@34.552,20.193 ; v1(34.036,4.191) C16.1@34.552,4.191 ; v1(34.036,5.969) R29.2@34.552,5.969 ; v1(34.036,21.971) R27.2@34.552,21.971 ; C12.1@35.052,11.692 35.941,11.692 ; R13.1@35.171,16.891 R6.1@35.171,16.002 v1(35.687,16.002) ; v1(35.941,13.208) 35.941,11.692 ; C11.1@36.957,11.692 35.941,11.692 ; v1(36.957,16.891) C10.1@36.957,17.788
  Top Layer w0.508: v2(11.729,26.035) C7.1@11.729,26.797
  Bottom Layer w0.254: U5.15@36.931,18.06 36.931,16.917 v1(36.957,16.891)
  Bottom Layer w0.381: v1(9.398,2.54) C27.1@10.93,2.54 ; v1(16.756,5.834) C28.1@17.272,5.834 17.722,6.284 U4.5@19.118,6.284 19.118,5.647 19.431,5.334 U4.2@21.268,5.334 ; v1(19.177,9.906) C5.1@19.693,9.906 ; v1(19.177,18.288) C4.1@19.693,18.288 ; v1(20.066,11.049) U1.2@20.066,12.122 ; v1(22.53,13.089) C21.1@23.241,13.089 ; C9.1@23.715,7.358 v1(23.715,8.509) ; v1(25.815,5.207) C8.1@25.815,6.358 ; C25.1@26.662,14.986 v1(27.178,14.986) C24.1@27.694,14.986 ; v1(28.587,4.191) 28.837,4.441 C2.1@28.837,5.334 ; C3.1@29.837,7.112 29.837,8.005 v1(30.087,8.255) ; J2.6@31.75,28 31.945,27.805 R36.2@34.163,27.805 ; v1(35.56,24.638) 35.814,24.384 U6.5@37.09,24.384 ; U7.5@37.09,8.382 v1(38.1,8.382)
  Bottom Layer w0.508: C22.2@13.208,25.53 v2(13.208,26.797) C17.2@13.208,28.064 ; C26.2@25.654,20.704 v1(25.654,21.971) ; C26.2@25.781,20.701 C23.2@27.686,20.701
  other v1: 12.954,2.54 16.51,3.81
LED_0: P1.L4 R18.1 U2.14 U2.23 | length 40.8
  Top Layer w0.152: v1(27.432,22.733) 27.432,21.031 28.667,19.796 U2.23@28.667,18.576 28.667,17.053 29.169,16.551 U2.14@32.292,16.551
  Bottom Layer w0.152: P1.L4@3.1,21.325 3.1,17.982 3.556,17.526 9.017,17.526 13.462,21.971 22.995,21.971 R18.1@23.249,22.225 23.249,22.868 23.622,23.241 25.781,23.241 26.289,22.733 v1(27.432,22.733)
LED_1: R19.1 U2.15 | length 2.5
  Top Layer w0.152: v1(30.734,17.272) 31.055,16.951 U2.15@32.292,16.951
  Bottom Layer w0.152: R19.1@30.67,18.042 30.67,17.335 v1(30.734,17.272)
MDI0_R_N: R8.1 U2.34 | length 11.5
  Top Layer w0.152: R8.1@20.693,9.017 20.985,8.725 21.209,8.725 21.463,8.979 21.463,9.398 20.955,9.906 20.955,15.925 21.933,16.903 22.993,16.903 23.041,16.951 U2.34@23.842,16.951
MDI0_R_P: R7.1 U2.35 | length 11.5
  Top Layer w0.152: R7.1@20.693,8.128 20.985,8.42 21.335,8.42 21.768,8.853 21.768,9.524 21.26,10.032 21.26,15.799 22.06,16.599 22.993,16.599 23.041,16.551 U2.35@23.842,16.551
MDI0_T_N: R5.1 U2.37 | length 7.6
  Top Layer w0.152: R5.1@20.693,19.177 v1(21.463,19.177) ; v1(22.53,15.881) 22.66,15.751 U2.37@23.842,15.751
  Bottom Layer w0.152: v1(21.463,19.177) 21.755,19.469 21.971,19.469 22.225,19.215 22.225,17.272 23.165,16.332 23.165,15.881 22.987,15.703 22.708,15.703 v1(22.53,15.881)
MDI0_T_P: R4.1 U2.38 | length 8.6
  Top Layer w0.152: R4.1@20.693,20.066 v1(21.463,20.066) ; v1(22.53,15.221) 22.66,15.351 U2.38@23.842,15.351
  Bottom Layer w0.152: v1(21.463,20.066) 21.755,19.774 22.097,19.774 22.53,19.341 22.53,17.398 23.47,16.458 23.47,15.755 23.113,15.399 22.708,15.399 v1(22.53,15.221)
MDI_R_N: P1.R8 R8.2 R12.2 U1.4 | length 22.4
  Top Layer w0.152: P1.R8@16.88,10.555 16.64,10.795 15.732,10.795 15.351,10.414 15.351,9.16 15.786,8.725 18.885,8.725 v1(19.177,9.017) R8.2@19.693,9.017
  Bottom Layer w0.152: U1.4@19.116,14.802 19.116,13.807 18.923,13.614 18.39,13.614 18.072,13.297 17.983,13.207 17.983,9.22 17.526,8.763 15.748,8.763 15.351,9.16 15.351,10.414 ; v1(19.177,9.017) R12.2@19.693,9.017 ; 15.351,10.414 15.732,10.795 ; 15.351,10.414 15.732,10.795 ; 15.732,10.795 P1.R8@16.64,10.795 ; 15.732,10.795 P1.R8@16.64,10.795 ; P1.R8@16.64,10.795 P1.R8@16.88,10.555 P1.R8@16.64,10.795
MDI_R_P: P1.R7 R7.2 R11.2 U1.3 | length 22.4
  Top Layer w0.152: P1.R7@14.34,11.825 15.046,11.119 15.046,9.034 15.66,8.42 18.885,8.42 v1(19.177,8.128) R7.2@19.693,8.128
  Bottom Layer w0.152: U1.3@19.116,12.122 19.116,13.117 18.923,13.31 18.517,13.31 18.288,13.081 18.288,9.094 17.652,8.458 15.622,8.458 15.532,8.547 15.046,9.034 15.046,11.119 ; v1(19.177,8.128) R11.2@19.693,8.128 ; 15.046,11.119 P1.R7@14.34,11.825 15.046,11.119
MDI_T_N: P1.R2 R5.2 R10.2 U1.6 | length 19.3
  Top Layer w0.152: P1.R2@16.88,18.175 16.24,18.815 16.24,19.161 16.548,19.469 18.885,19.469 v1(19.177,19.177) R5.2@19.693,19.177
  Bottom Layer w0.152: P1.R2@16.88,18.175 16.24,18.815 16.24,19.304 16.621,19.685 17.653,19.685 18.034,19.304 18.034,16.968 18.619,16.383 21.082,16.383 21.717,15.748 21.717,13.843 21.488,13.614 21.209,13.614 21.016,13.807 U1.6@21.016,14.802 ; v1(19.177,19.177) R10.2@19.693,19.177
MDI_T_P: P1.R1 R4.2 R9.2 U1.1 | length 21.5
  Top Layer w0.152: P1.R1@14.34,19.445 16.093,19.445 16.422,19.774 18.885,19.774 v1(19.177,20.066) R4.2@19.693,20.066
  Bottom Layer w0.152: P1.R1@14.34,19.445 15.95,19.445 16.495,19.99 17.779,19.99 18.339,19.43 18.339,17.094 18.745,16.688 21.208,16.688 22.022,15.874 22.022,13.717 21.933,13.627 21.615,13.31 21.209,13.31 21.016,13.117 U1.1@21.016,12.122 ; v1(19.177,20.066) R9.2@19.693,20.066
NetC4_2: C4.2 R9.1 R10.1 | length 1.8
  Bottom Layer w0.381: C4.2@20.693,18.288 R10.1@20.693,19.177 R9.1@20.693,20.066
NetC5_2: C5.2 R11.1 R12.1 | length 1.8
  Bottom Layer w0.381: R11.1@20.693,8.128 R12.1@20.693,9.017 C5.2@20.693,9.906
NetC6_2: C6.2 P1.R3 | length 5.4
  Top Layer w0.381: P1.R3@14.34,16.905 14.354,16.891 C6.2@19.693,16.891
NetC11_2: C11.2 U5.2 | length 1.8
  Top Layer w0.152: C11.2@36.957,12.692 v1(36.957,13.208)
  Bottom Layer w0.152: U5.2@36.931,11.912 36.931,13.182 v1(36.957,13.208)
NetC12_2: C12.2 U5.6 | length 2.4
  Top Layer w0.152: C12.2@35.052,12.692 v1(35.052,13.208)
  Bottom Layer w0.152: U5.6@34.331,11.912 34.331,12.995 34.544,13.208 v1(35.052,13.208)
NetC13_1: C13.1 U5.1 | length 1.6
  Bottom Layer w0.152: U5.1@37.581,11.912 37.581,10.544 C13.1@37.711,10.414
NetC13_2: C13.2 U5.3 | length 1.7
  Bottom Layer w0.152: U5.3@36.281,11.912 36.281,10.844 C13.2@36.711,10.414
NetC14_1: C14.1 U5.4 | length 1.5
  Bottom Layer w0.152: U5.4@35.631,11.912 35.631,10.462 C14.1@35.679,10.414
NetC14_2: C14.2 U5.5 | length 1.6
  Bottom Layer w0.152: C14.2@34.679,10.414 34.981,10.716 U5.5@34.981,11.912
NetD1_2: D1.2 R36.1 | length 1.5
  Top Layer w0.152: v1(33.528,26.505) D1.2@34.29,26.505
  Bottom Layer w0.152: v1(33.528,26.505) 33.828,26.805 R36.1@34.163,26.805
NetD2_2: D2.2 R37.1 | length 7.7
  Top Layer w0.152: R37.1@28.829,25.519 29.37,26.06 30.328,26.06 30.632,25.756 35.357,25.756 35.56,25.959 D2.2@35.56,26.505
NetD3_2: D3.2 R38.1 | length 7.7
  Bottom Layer w0.152: R38.1@28.829,25.519 29.37,26.06 30.328,26.06 30.632,25.756 35.357,25.756 35.56,25.959 D3.2@35.56,26.505
NetD4_2: D4.2 R39.1 | length 8
  Top Layer w0.152: R39.1@29.718,25.519 29.786,25.451 36.576,25.451 36.83,25.705 D4.2@36.83,26.505
NetD5_2: D5.2 R40.1 | length 8
  Bottom Layer w0.152: R40.1@29.718,25.519 29.786,25.451 36.576,25.451 36.83,25.705 D5.2@36.83,26.505